# Altium PCB SCHEMATICO segunda.PcbDoc
Units mil, origin at the board's own origin, x right, y up, seen from the top; angles counter-clockwise.
Board outline 1904.96 x 812.99 mil, 2 copper layers (Top, Bottom); 27 components, 41 nets, 120 pads, 18 vias.
Unrouted connection lines stored in the file: 1.
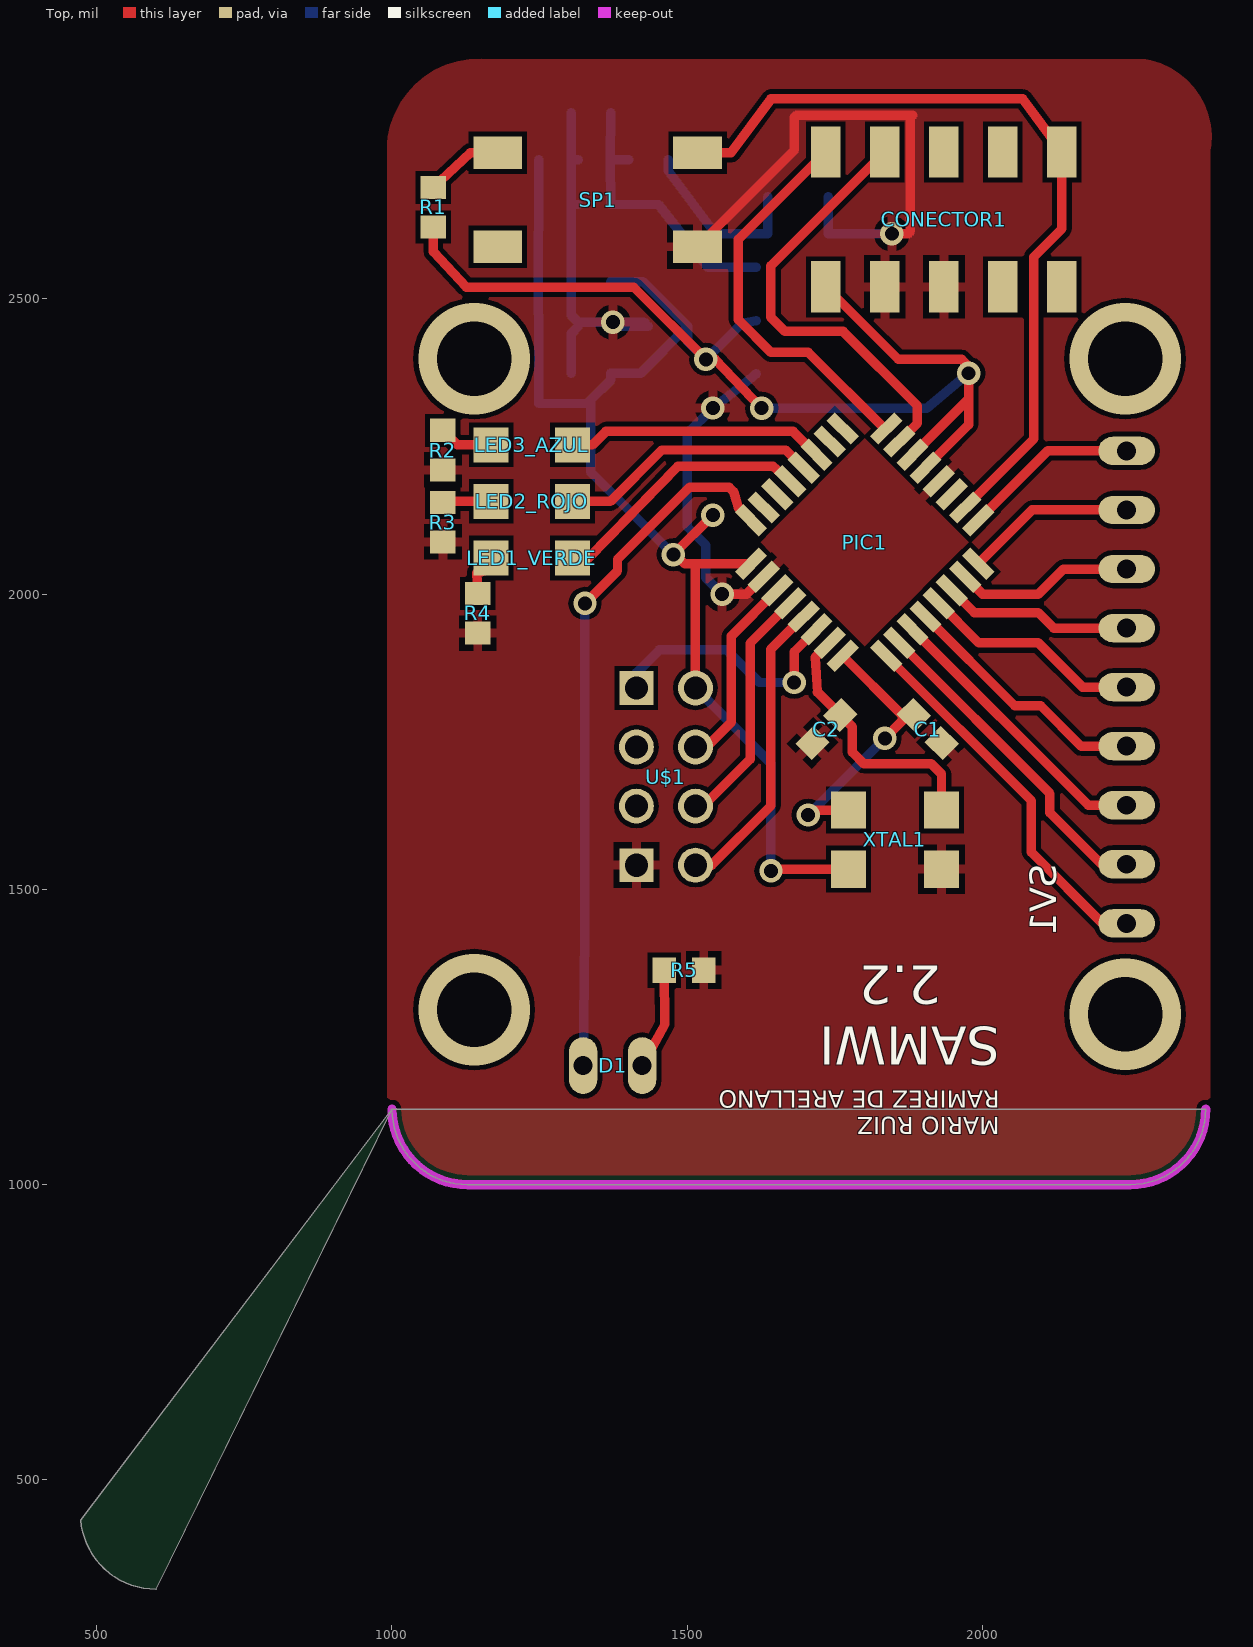
[diagram p0: Top view]
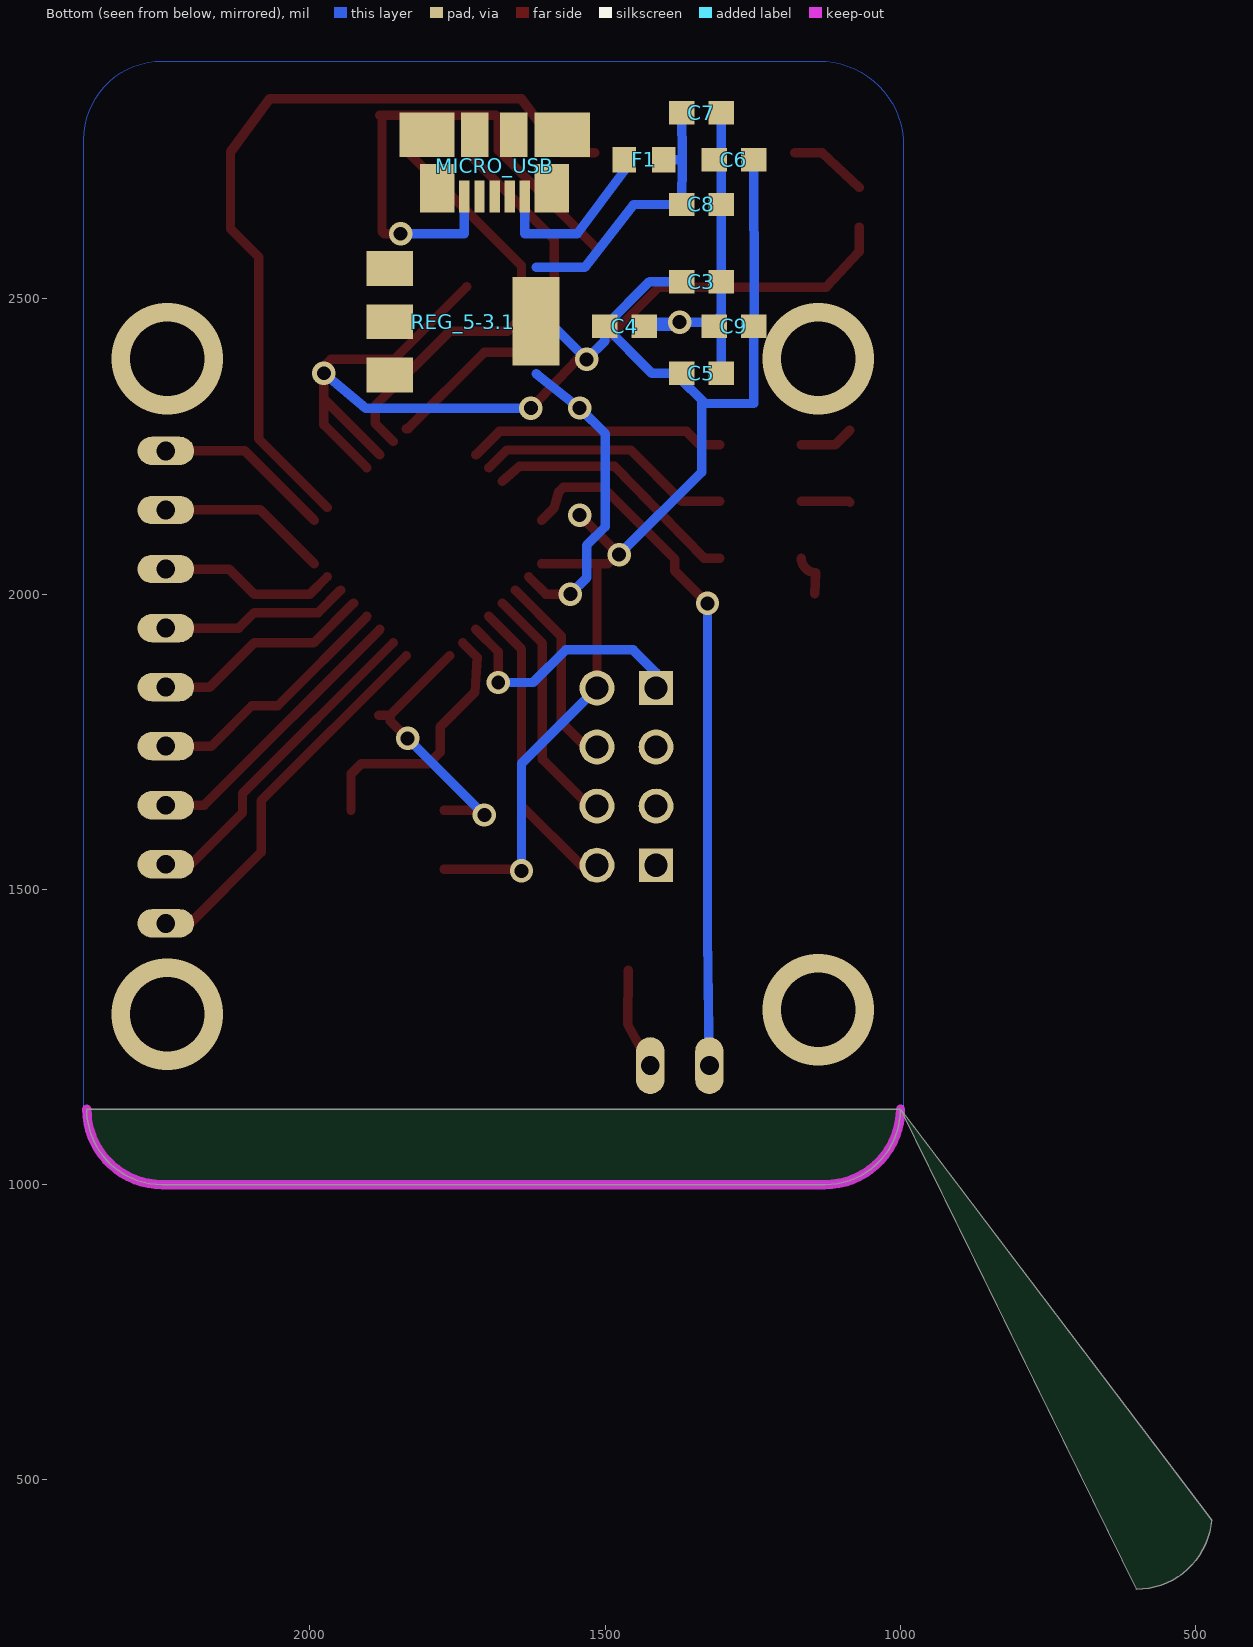
[diagram p1: Bottom view, seen from below]

## Layer stack, top to bottom
Top Solder: solder mask 0.4, Solder Resist, Dk 3.5
Top: signal copper 1.378
Dielectric 1: dielectric 12.6, FR-4, Dk 4.8
Bottom: signal copper 1.378
Bottom Solder: solder mask 0.4, Solder Resist, Dk 3.5

## Board outline
1000,1127.95 ccw(c1127.95,1127.95) 1127.95,1000 2250,1000 ccw(c2250,1127.95) 1000,1127.95 ccw(c600.39,442.91)

## Design rules (kind name [scope] priority, off if disabled: settings)
Clearance "Clearance (Same Net)" [All] p1: gap=7.87 ignorepadtopadclearanceinfootprint=FALSE
Clearance [All] p2: gap=7.87 ignorepadtopadclearanceinfootprint=FALSE except(10: Arc-Poly Track-Poly SMDPad-Poly THPad-Poly Via-Poly Fill-Poly Poly-Poly Poly-Region Poly-Text Poly-Hole)
HoleSize [All] p1: absolutevalues=TRUE maxlimit=100000 minlimit=24 maxpercent=80.000 minpercent=20.000
HoleToHoleClearance mdDrill [All] p1: gap=8 allowstackedmicrovias=TRUE
PasteMaskExpansion mlMinCreamFrame [All] p1: expansion=0
PolygonConnect PolygonConnect_For_PolygonThermal_ON_Width100000_Gap100000 [InPolygonClass('PolygonThermal_ON_Width100000_Gap100000')] p1: connectstyle=Relief reliefconductorwidth=10 reliefentries=4 polygonreliefangle="90 Angle" airgapwidth=10
PolygonConnect PolygonConnect_For_PolygonThermal_ON_Width160000_Gap100000 [InPolygonClass('PolygonThermal_ON_Width160000_Gap100000')] p2: connectstyle=Relief reliefconductorwidth=16 reliefentries=4 polygonreliefangle="90 Angle" airgapwidth=10
PolygonConnect ThermalVias [IsVia] p3: connectstyle=Direct reliefconductorwidth=10 reliefentries=4 polygonreliefangle="90 Angle" airgapwidth=10
PolygonConnect [All] p4: connectstyle=Relief reliefconductorwidth=10 reliefentries=4 polygonreliefangle="90 Angle" airgapwidth=10
RoutingVias [All] p1: holewidth=24 width=72 viastyle="Through Hole" minholewidth=24 minwidth=72 maxholewidth=100 maxwidth=100
SolderMaskExpansion mlMinStopFrame [All] p1: expansion=4
Width [All] p1: maxlimit=10000 minlimit=10 preferedwidth=10
27 further rules are at their usual default settings.

## Classes and differential pairs
polygon class PolygonThermal_ON_Width100000_Gap100000: Polygon_1_Net_N$32
polygon class PolygonThermal_ON_Width160000_Gap100000: Polygon_1_Net_GND
polygon class Isolate_10: Polygon_1_Net_N$32

## Components (designator, comment, footprint, x,y, rotation, side; value= is the part's Value field where it differs from the comment)
C1 "" C0603 1907.36,1771.58 r315 top
C2 "" C0603 1735.6,1771.58 r225 top
C3 "" C0603 1337.16,2529.18 r0 bottom
C4 "" C0603 1467.08,2453.5 r0 bottom
C5 "" C0603 1337.16,2373.86 r0 bottom
C6 "" C0603 1282.13,2735.48 r0 bottom
C7 "" C0603 1337.16,2815.12 r180 bottom
C8 "" C0603 1337.16,2659.8 r180 bottom
C9 "" C0603 1282.13,2453.5 r0 bottom
CONECTOR1 "" CONNECTORS 1935.28,2635.39 r0 top
D1 "" SFH482 1373.66,1201.74 r0 top
F1 "" R0603 1434.5,2735.48 r0 bottom
LED1_VERDE "" CHIPLED_1206 1236.85,2061.07 r90 top
LED2_ROJO "" CHIPLED_1206 1236.85,2157.13 r90 top
LED3_AZUL "" CHIPLED_1206 1236.85,2252.8 r90 top
MICRO_USB "" MOLEX_47346-0001 1687.27,2673.1 r0 bottom
PIC1 "" QFP80P900X900X120-32N 1800.19,2088.05 r315 top
R1 "" R0603 1069.95,2655.14 r90 top
R2 "" R0603 1086.18,2243.86 r90 top
R3 "" R0603 1086.18,2121.81 r90 top
R4 "" R0603 1145.23,1967.48 r90 top
R5 "" R0603 1494.49,1363.39 r180 top
REG_5-3.1 "" SOT223 1741.1,2462.16 r270 bottom
SP1 "" PULSADOR 1230.22,2787.39 r270 top
SV1 "" FE09 2244.1,1842.52 r90 top
U$1 "ESP01" ESP01 1191.95,1691.69 r90 top
XTAL1 "" XTAL16MM2 1788.74,1682.72 r270 top

## Footprints (in the part's own frame and the unit in brackets; to place one, negate y for a bottom-side part, rotate by r counter-clockwise, add the part's x,y. Pads: shape width x height; smd on the part's side, far side on the other; paste and mask are expansions set on the pad)
C0603 [mm] "C0603"
  rect 1.1x1 smd: 1(-0.85,0) 2(0.85,0)
CHIPLED_1206 [mil] "CHIPLED_1206"
  rect 59.06x59.06 smd: A(0,-68.9) C(0,68.9)
CONNECTORS [mm] "CONNECTORS"
  rect 1.27x2.2 smd: 1(-5.1,-2.92) 2(-5.1,2.88) 3(-2.56,-2.92) 4(-2.56,2.88) 5(-0.02,-2.92) 6(-0.02,2.88) 7(2.52,-2.92) 8(2.52,2.88) 9(5.06,-2.92) 10(5.06,2.88)
ESP01 [mm] "ESP01"
  round 1.5 / inner round 1.524 / far side round 1.5 hole 1: CH_PD(-1.285,-8.178) GPIO0(1.255,-5.638) GPIO2(-1.285,-5.638) RST(1.255,-8.178) TX(-3.825,-8.178) VCC(3.795,-8.178)
  rect 1.452x1.452 / inner rect 1.524x1.524 / far side rect 1.452x1.452 hole 1: GND(-3.825,-5.638) RX(3.795,-5.638)
FE09 [mil] "FE09"
  oval 48x96 / inner round 60 / far side oval 48x96 hole 32: 1(-400,0) 2(-300,0) 3(-200,0) 4(-100,0) 5(0,0) 6(100,0) 7(200,0) 8(300,0) 9(400,0)
MOLEX_47346-0001 [mm] "MOLEX_47346-0001"
  rect 0.45x1.38 smd: 1(-1.3,0) 2(-0.65,0) 3(0,0) 4(0.65,0) 5(1.3,0)
  rect 1.475x2.1 smd: M1(-2.463,-0.36) M2(2.463,-0.36)
  rect 2.375x1.9 smd: M3(-2.913,-2.66) M6(2.913,-2.66)
  rect 1.175x1.9 smd: M4(-0.82,-2.66) M5(0.85,-2.66)
PULSADOR [mil] "PULSADOR"
  rect 55.12x82.68 smd: 1(40.09,287.24) 2(40.09,-51.02) 3(199.13,287.24) 4(199.13,-51.02)
QFP80P900X900X120-32N [mil] "QFP80P900X900X120-32N"
  rect 58x20 smd: 1(-162,110) 2(-162,79) 3(-162,47) 4(-162,16) 5(-162,-16) 6(-162,-47) 7(-162,-79) 8(-162,-110) 17(162,-110) 18(162,-79) 19(162,-47) 20(162,-16) 21(162,16) 22(162,47) 23(162,79) 24(162,110)
  rect 20x58 smd: 9(-110,-162) 10(-79,-162) 11(-47,-162) 12(-16,-162) 13(16,-162) 14(47,-162) 15(79,-162) 16(110,-162) 25(110,162) 26(79,162) 27(47,162) 28(16,162) 29(-16,162) 30(-47,162) 31(-79,162) 32(-110,162)
R0603 [mm] "R0603"
  rect 1x1.1 smd: 1(-0.85,0) 2(0.85,0)
SFH482 [mil] "SFH482"
  oval 48x96 / inner round 60 / far side oval 48x96 hole 32: A(-50,0) K(50,0)
SOT223 [mil] "SOT223"
  rect 59x79 smd: 1(-89,-124) 2(1,-124) 3(91,-124)
  rect 150x79 smd: 4(0,124)
XTAL16MM2 [mil] "XTAL16MM2"
  rect 62.99x59.06 smd: 1(48.43,141.73) 2(148.43,141.73) 3(48.43,-15.75) 4(148.43,-15.75)

## Part data
C1 C2 C3 C4 C5 C6 C7 C8 C9: library part C0603, PackageName=C0603
CONECTOR1: library part CONNECTORS, PackageName=CONNECTORS
D1: library part SFH482, PackageName=SFH482
F1 R1 R2 R3 R4 R5: library part R0603, PackageName=R0603
LED1_VERDE LED2_ROJO LED3_AZUL: library part CHIPLED_1206, PackageName=CHIPLED_1206
MICRO_USB: library part MOLEX_47346-0001, PackageName=MOLEX_47346-0001
PIC1: library part QFP80P900X900X120-32N, PackageName=QFP80P900X900X120-32N
REG_5-3.1: library part SOT223, PackageName=SOT223
SP1: library part PULSADOR, PackageName=PULSADOR
SV1: library part FE09, PackageName=FE09
XTAL1: library part XTAL16MM2, PackageName=XTAL16MM2
U$1: PackageName=ESP01

## Via types
v1: diameter 39.62/39.62 (per signal layer), hole 23.62, Top to Bottom, tented both sides, 14 vias
v2: diameter 188.97/188.97 (per signal layer), hole 125.98, Top to Bottom, 4 vias

## Nets (pads, with @x,y where several pads share a name; then routed paths per layer and width w, separated by ;. In a path a pad name is that pad's centre, name@x,y a point inside that pad or via, vN(x,y) a via of type N, cw(c..) or ccw(c..) an arc to the next point about the centre after c; other vN are vias at no path point)
D+: MICRO_USB.3
D-: MICRO_USB.2
GND: C1.2 C2.2 C3.1 C4.1 C5.1 C6.2 C7.2 C8.2 C9.2 CONECTOR1.3 CONECTOR1.5 MICRO_USB.5 PIC1.10 PIC1.28 R2.1 R3.1 R4.1 R5.1 REG_5-3.1.1 SP1.3 U$1.GND XTAL1.2 | length 2092.7
  Top w16: v1@1374.02,2452.76 v1(1374.02,2460.63) ; SP1.3 1681.1,2751.9 1681.1,2807.09 1685.04,2811.02 1881.89,2811.02 1877.95,2807.09 1877.95,2614.17 1874.02,2610.24 v1(1846.46,2610.24) ; v1(1559.06,2000) 1600.42,2000 PIC1.10
  Bottom w16: C5.1 1303.7,2441.6 C9.2 1314.96,2454.13 C9.2@1314.96,2460.63 ; C7.2 C6.2@1303.7,2735.48 ; C8.2@1315.59,2659.8 C8.2 ; C6.2 C6.2@1303.7,2735.48 ; v1(1559.06,2000) 1531.5,2027.56 1531.5,2082.68 1500,2114.17 1500,2271.81 v1(1543.31,2315.12) 1617.1,2373.16 ; MICRO_USB.5@1738.46,2673.1 1738.46,2610.24 v1(1846.46,2610.24) ; C8.2 C3.1 1303.7,2471.89 C9.2@1314.96,2460.63 ; C8.2 C6.2@1303.7,2735.48 ; C9.2@1314.96,2460.63 v1(1374.02,2460.63) ; v1(1374.02,2460.63) 1426.49,2460.63 C4.1 1381.15,2453.5 v1(1374.02,2460.63)
ID: MICRO_USB.4
JTAG: CONECTOR1.10 PIC1.26 SP1.1 | length 1378.3
  Top w16: SP1.1 1574.08,2747.3 1641.73,2838.58 2068.31,2838.58 CONECTOR1.10 2134.49,2618.74 2086.62,2570.87 2086.62,2262.75 PIC1.26
N$1: C2.1 PIC1.15 XTAL1.1 | length 447.7
  Top w16: PIC1.15 1716.54,1892.67 1720.47,1834.03 C2.1 1779.53,1774.98 1779.53,1732.28 1799.21,1712.6 1913.39,1712.6 1930.47,1695.52 XTAL1.1
N$2: C1.1 PIC1.16 XTAL1.3 | length 468.8
  Top w16: v1(1704.73,1625.98) 1713.04,1634.3 XTAL1.3 ; PIC1.16 C1.1@1863.89,1795.24 ; v1(1834.65,1755.91) 1863.89,1785.15 C1.1@1863.89,1795.24 ; C1.1 C1.1@1863.89,1795.24
  Bottom w16: v1(1704.73,1625.98) v1(1834.65,1755.91)
N$3: PIC1.17 SV1.1 | length 645.8
  Top w16: PIC1.17 2082.68,1649.99 2082.68,1562.99 2203.15,1442.52 SV1.1
N$4: PIC1.12 U$1.CH_PD | length 417.8
  Top w16: U$1.CH_PD 1526.92,1641.1 1606.3,1720.47 1606.3,1916.79 PIC1.12
N$5: PIC1.11 U$1.RST | length 333.9
  Top w16: U$1.RST 1532.43,1741.1 1574.8,1783.47 1574.8,1929.13 PIC1.11
N$6: LED1_VERDE.C R4.2 | length 74.3
  Top w16: R4.2 1143.26,2036.38 ccw(c1143.27,2061.07) LED1_VERDE.C
N$7: LED3_AZUL.A PIC1.3 | length 439
  Top w16: LED3_AZUL.A 1339.41,2252.8 1362.21,2275.59 1679.11,2275.59 PIC1.3
N$8: LED2_ROJO.C R3.2 | length 82.6
  Top w16: R3.2 1088.04,2157.13 LED2_ROJO.C
N$9: LED1_VERDE.A PIC1.5 | length 443.6
  Top w16: LED1_VERDE.A 1332.72,2061.07 1484.25,2216.54 1645.14,2216.54 PIC1.5
N$10: LED2_ROJO.A PIC1.4 | length 439.7
  Top w16: LED2_ROJO.A 1369.73,2157.13 1456.69,2244.1 1666.77,2244.1 PIC1.4
N$11: LED3_AZUL.C R2.2 | length 91.9
  Top w16: R2.2 1110.7,2252.8 LED3_AZUL.C
N$12: R1.2 SP1.2 | length 132.4
  Top w16: R1.2 1132.59,2747.3 SP1.2
N$13: F1.2 MICRO_USB.1 | length 303.1
  Bottom w16: F1.2 1467.97,2717.08 1547.25,2610.24 1636.09,2610.24 MICRO_USB.1
N$14: PIC1.18 SV1.2 | length 559.6
  Top w16: PIC1.18 2114.17,1662.34 2114.17,1629.92 2201.58,1542.52 SV1.2
N$16: PIC1.19 SV1.3 | length 485.9
  Top w16: PIC1.19 2179.25,1642.52 SV1.3
N$17: PIC1.20 SV1.4 | length 431.7
  Top w16: PIC1.20 2054.58,1811.02 2098.43,1811.02 2166.93,1742.52 SV1.4
N$19: PIC1.23 SV1.7 | length 303.3
  Top w16: PIC1.23 1999.96,2000 2094.49,2000 2137.01,2042.52 SV1.7
N$20: PIC1.24 SV1.8 | length 289.4
  Top w16: PIC1.24 2083.76,2142.52 SV1.8
N$21: 
  other v2: 1138.98,1296.46
N$22: 
  other v2: 1138.98,2398.82
N$23: D1.A PIC1.8 | length 1189.2
  Top w16: v1(1326.77,1984.25) 1381.89,2039.37 1381.89,2059.06 1503.94,2181.1 1570.87,2181.1 1578.74,2173.23 1586.62,2146.06 PIC1.8
  Bottom w16: D1.A 1326.77,1423.42 v1(1326.77,1984.25)
N$24: D1.K R5.2 | length 171.6
  Top w16: D1.K 1462.17,1271.69 R5.2
N$25: 
  other v2: 2241.34,1288.58
N$26: 
  other v2: 2241.34,2398.82
N$27: PIC1.21 SV1.5 | length 377
  Top w16: PIC1.21@1926.05,1984.81 1993.54,1917.32 2094.49,1917.32 2169.29,1842.52 SV1.5
N$28: PIC1.22 SV1.6 | length 322.7
  Top w16: PIC1.22 1986.2,1968.5 2094.49,1968.5 2120.47,1942.52 SV1.6
N$29: PIC1.25 SV1.9 | length 300.3
  Top w16: PIC1.25 2110.23,2242.52 SV1.9
N$30: 
N$31: 
N$32: 
RXD: PIC1.14 U$1.RX | length 446
  Top w16: v1(1681.1,1850.39) 1681.1,1902.49 PIC1.14
  Bottom w16: U$1.RX 1413.89,1866.65 1452.76,1905.51 1566.93,1905.51 1622.05,1850.39 v1(1681.1,1850.39) v1@1677.17,1858.27
SWD_CLK: CONECTOR1.4 PIC1.31 | length 743.3
  Top w16: CONECTOR1.4 1641.73,2556.02 1641.73,2468.5 1665.36,2444.88 1763.78,2444.88 1889.76,2318.9 1889.76,2289.35 PIC1.31
SWD_IO: CONECTOR1.2 PIC1.32 | length 672.1
  Top w16: CONECTOR1.2 1586.62,2600.9 1586.62,2464.57 1641.73,2409.45 1704.73,2409.45 1833.79,2280.38 PIC1.32
TXD: PIC1.13 U$1.TX | length 512.8
  Top w16: U$1.TX 1541.1,1541.1 1641.73,1641.73 1641.73,1906.96 PIC1.13
VCC_3V3: C3.2 C4.2 C5.2 C6.1 C9.1 CONECTOR1.1 PIC1.9 PIC1.29 PIC1.30 R1.1 REG_5-3.1.2 U$1.VCC XTAL1.4 | length 4042.7
  Top w16: R1.1 1069.95,2579.66 1125.99,2519.69 1409.45,2519.69 v1(1531.5,2397.64) 1547.25,2397.64 v1(1625.99,2314.96) ; U$1.VCC 1513.89,2051.28 ; v1(1543.31,2133.86) v1(1476.38,2066.93) 1495.97,2051.28 1513.89,2051.28 ; PIC1.9 1513.89,2051.28 ; v1(1641.73,1531.5) 1644.53,1534.3 XTAL1.4 ; CONECTOR1.1 1857.28,2397.64 1964.57,2397.64 1976.38,2385.83 v1(1976.38,2374.02) 1976.38,2330.71 ; PIC1.30 1976.38,2330.71 ; PIC1.29 1976.38,2286.86 1976.38,2330.71
  Bottom w16: C6.1 1247.88,2493.66 C9.1 1248.67,2322.84 1330.71,2322.84 1336.62,2328.74 ; C3.2 1424.87,2529.18 C4.2@1500.55,2453.5 ; v1(1476.38,2066.93) 1336.62,2206.69 1336.62,2328.74 ; U$1.VCC 1641.73,1713.26 v1(1641.73,1531.5) ; v1@1543.31,2129.92 v1(1543.31,2133.86) ; 1617.1,2463.16 1593.08,2459.22 v1(1531.5,2397.64) 1500.55,2428.59 C4.2@1500.55,2453.5 ; v1(1625.99,2314.96) 1905.51,2314.96 v1(1976.38,2374.02) ; 1336.62,2328.74 1370.63,2362.75 C5.2 1420.91,2373.86 C4.2@1500.55,2453.5
VCC_5V: C7.1 C8.1 F1.1 REG_5-3.1.3 | length 485.9
  Bottom w16: C7.1 1369.34,2736.22 ; F1.1 1370.08,2735.48 1369.34,2736.22 ; 1617.1,2553.16 1534.33,2553.16 1451.31,2659.8 C8.1 1369.34,2736.22
pads on no net: CONECTOR1.6 CONECTOR1.7 CONECTOR1.8 CONECTOR1.9 MICRO_USB.M1 MICRO_USB.M2 MICRO_USB.M3 MICRO_USB.M4 MICRO_USB.M5 MICRO_USB.M6 PIC1.1 PIC1.2 PIC1.6 PIC1.7 PIC1.27 REG_5-3.1.4 SP1.4 U$1.GPIO0 U$1.GPIO2

## Polygon pours and split planes (outlines as drawn)
GND on Top "Polygon_1_Net_GND" (solid, remove dead copper, pour order 0): 992,1122.05 992,2764.15 cw(c1147.64,2750) 1161.79,2905.64 2276.27,2905.64 cw(c2253.93,2773.62) 2385.95,2751.29 2385.95,1137.8 cw(c2240.16,1137.8) 2240.16,992 1122.05,992 cw(c1122.05,1122.05)
N$32 on Bottom "Polygon_1_Net_N$32" (solid, remove dead copper, pour order 1): 1173.23,2902.64 1137.8,2902.64 ccw(c1137.8,2759.84) 995,2759.84 995,1135.83 ccw(c1127.95,1135.83) 1127.95,1002.87 2255.91,1002.87 2259.84,1002.87 ccw(c2259.84,1125.98) 2382.95,1125.98 2382.95,2769.69 ccw(c2250,2769.69) 2250,2902.64

## Keep-outs
Keep-Out Layer:
  lines w16: 1000,1127.95 ccw(c1127.95,1127.95) 1127.95,1000 2250,1000 ccw(c2250,1127.95) 2377.95,1127.95

## Other copper
Top:
  pour cut-out net N$31: 1673.23,2047.24 1897.64,2145.67 1905.51,2141.73
  pour cut-out net N$30: 1874.02,2169.29 1653.54,2074.8 1858.27,2188.98

## Silkscreen, mask and mechanical layers (free items; w line width, h text height)
Top Overlay:
  text "2.2" at 1929.92,1392.13 h109.85 r180
  text "SAMWI" at 2028.96,1288.29 h109.85 r180
  text "RAMIREZ DE ARELLANO" at 2028.96,1169.29 h49.6 r180
  text "MARIO RUIZ" at 2028.96,1124.41 h49.6 r180
Dimension:
  lines w10: 1002.99,2415.43 1002.99,2480.59
  lines w16: 1000,1127.95 ccw(c1127.95,1127.95) 1127.95,1000 2250,1000 ccw(c2250,1127.95) 2377.95,1127.95 ; 1000,1129.92 1000,2759.84 ; 1000,2761.81 cw(c1133.86,2763.78) 1131.89,2897.64 2214.57,2897.64 ; 2216.54,2897.64 2253.94,2897.64 cw(c2248.03,2767.72) 2377.95,2761.81 ; 2377.95,1125.98 2377.95,2759.84